# Altium PCB Game_Consol.PcbDoc
Units mil, origin at the board's own origin, x right, y up, seen from the top; angles counter-clockwise.
Board outline 3090.55 x 1732.28 mil, 2 copper layers (Top Layer, Bottom Layer); 54 components, 42 nets, 216 pads, 43 vias.
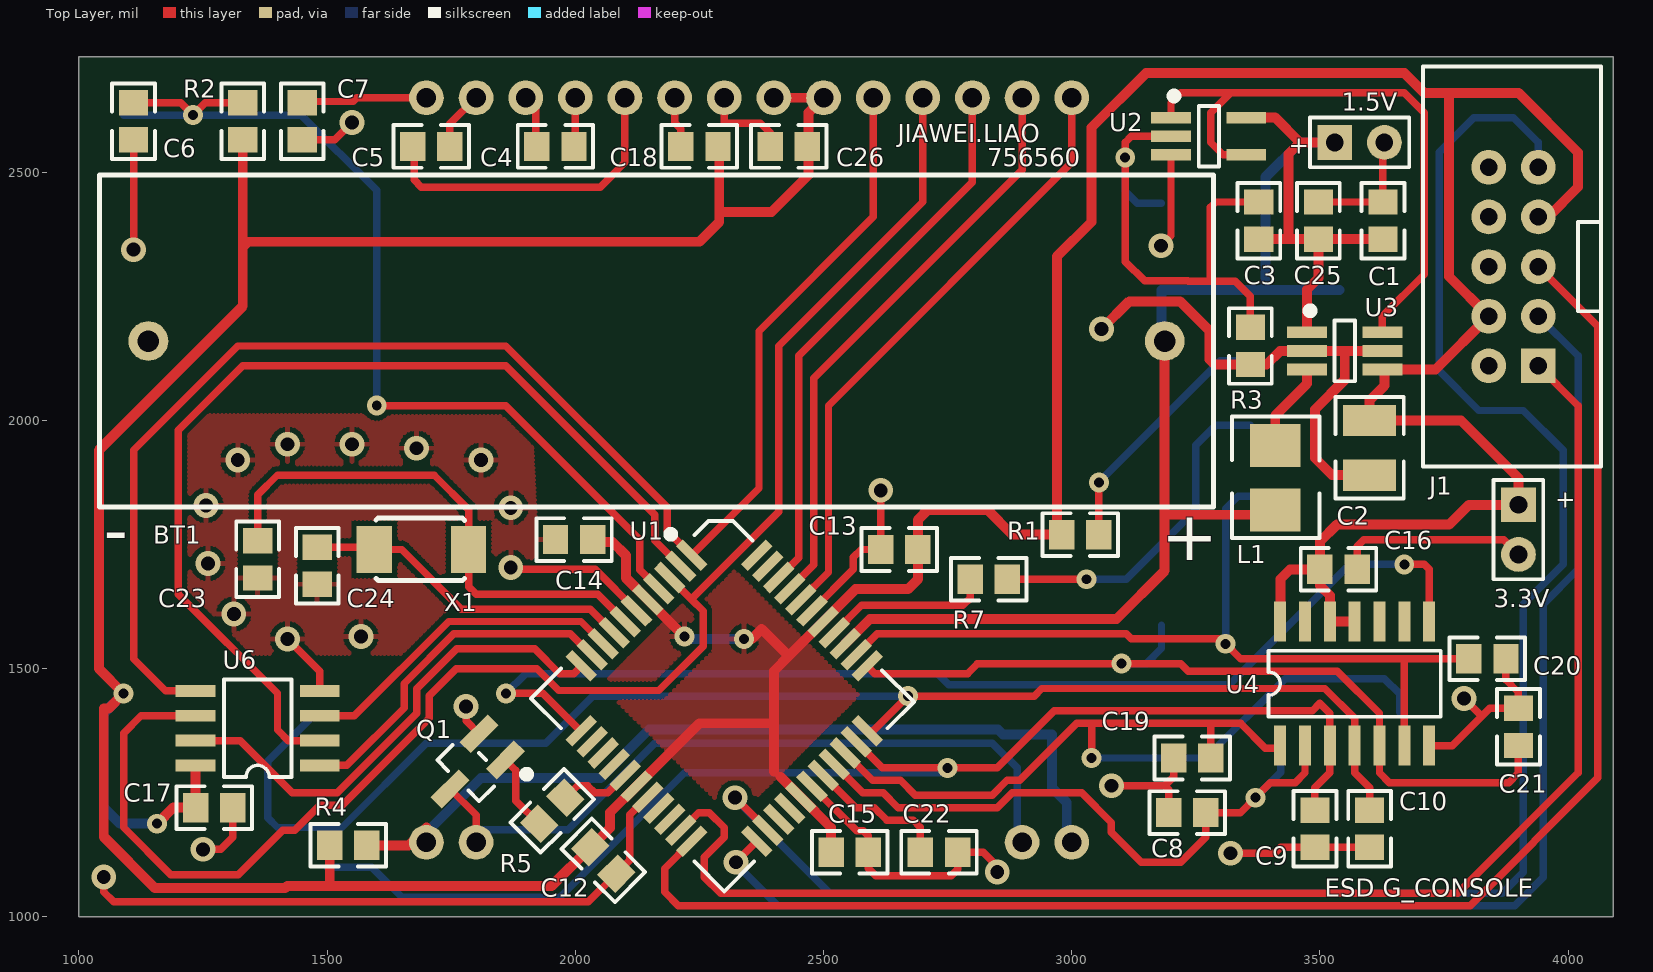
[diagram p0: Top Layer view]
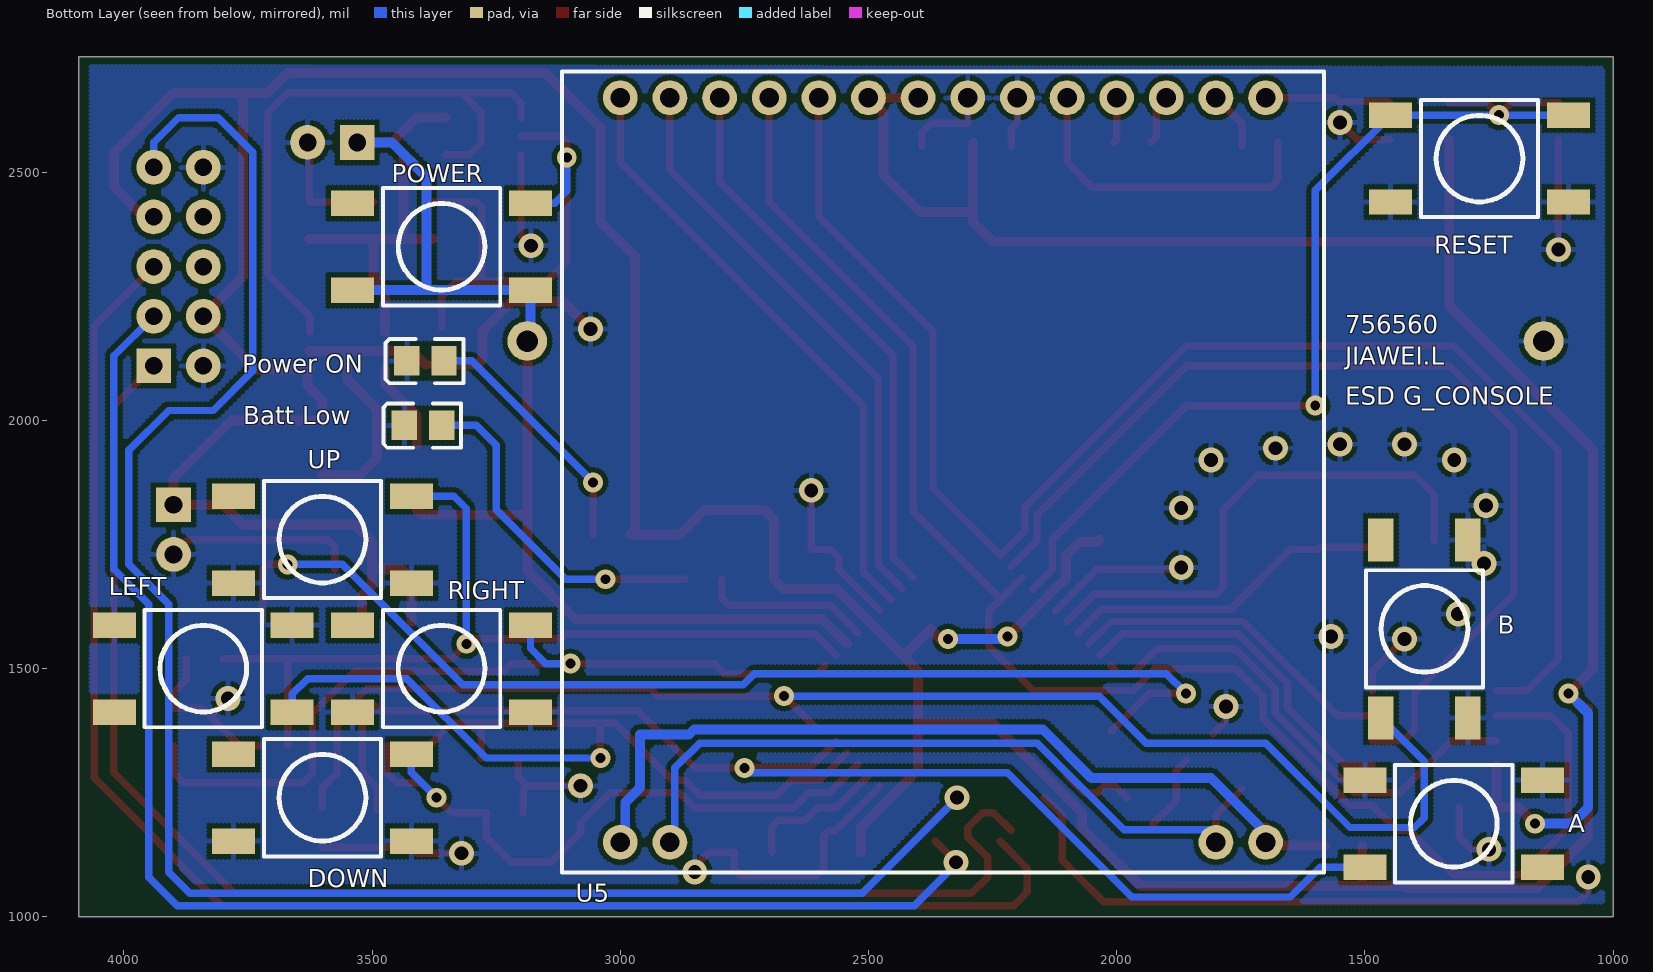
[diagram p1: Bottom Layer view, seen from below]
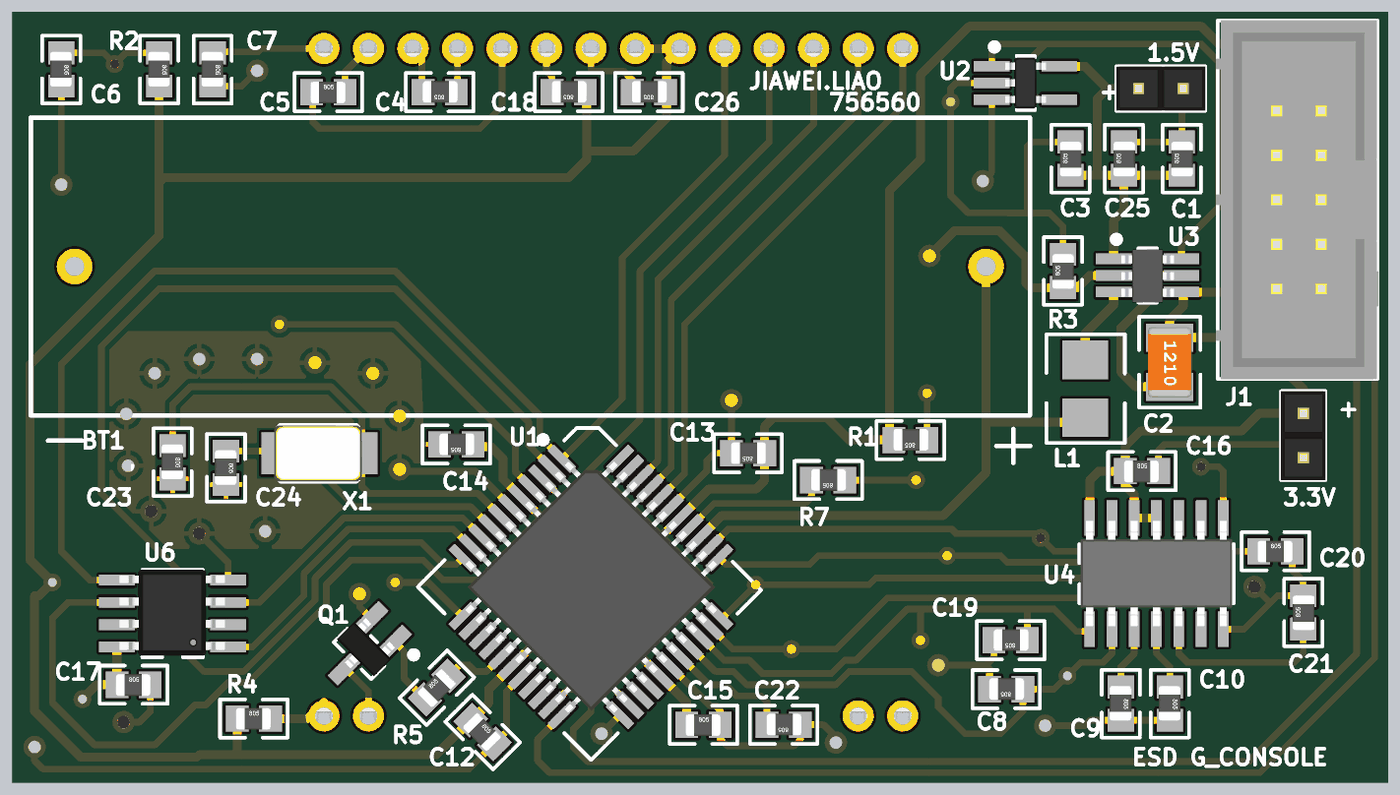
[diagram p2: 3D render of the assembled board from above, using the file's embedded part models]
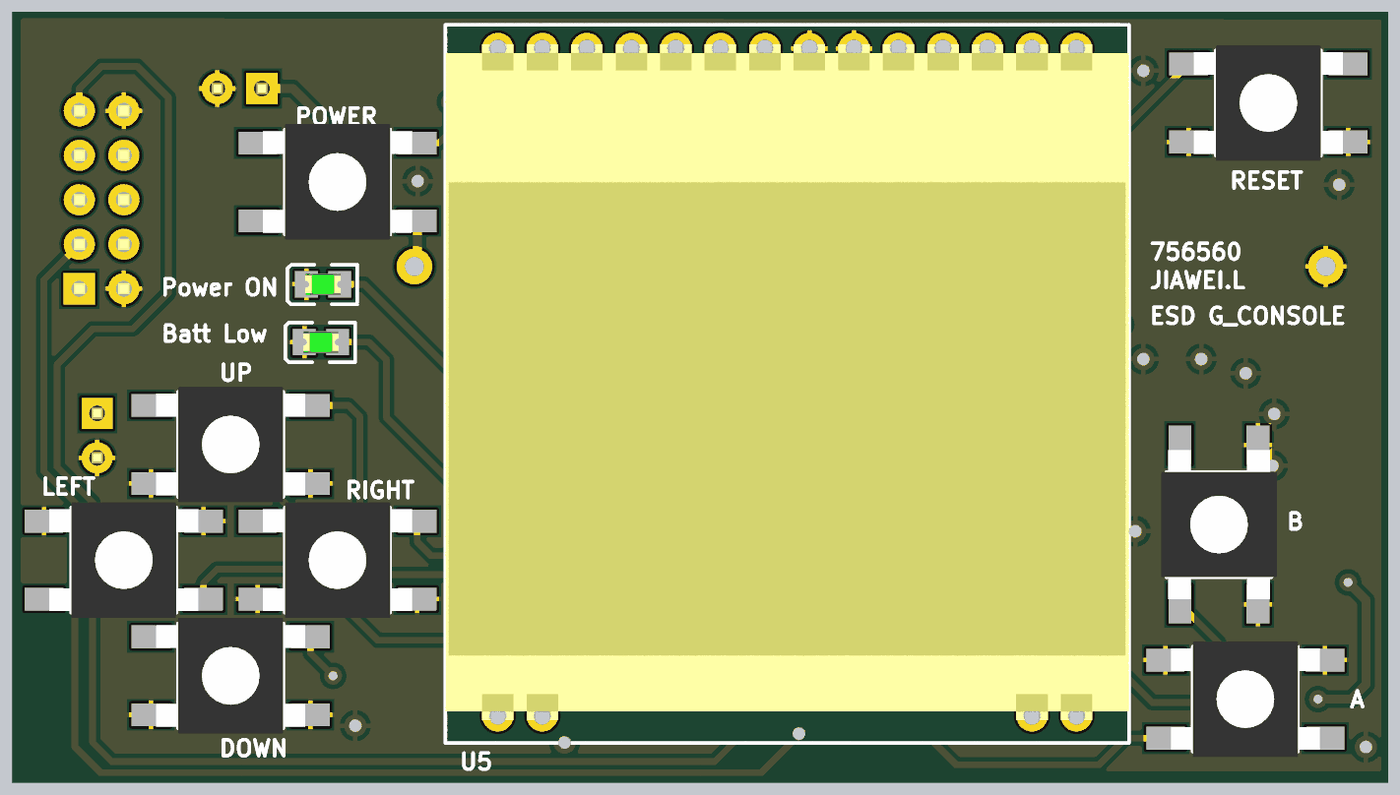
[diagram p3: 3D render of the assembled board from below, using the file's embedded part models]

## Layer stack, top to bottom
Top Solder: solder mask 0.4, Solder Resist, Dk 3.5
Top Layer: signal copper 1.4
Dielectric1: dielectric 12.6, FR-4, Dk 4.8
Bottom Layer: signal copper 1.4
Bottom Solder: solder mask 0.4, Solder Resist, Dk 3.5

## Board outline
1000,1000 1000,2732.28 4090.55,2732.28 4090.55,1000

## Design rules (kind name [scope] priority, off if disabled: settings)
Clearance [All] p1: gap=10 ignorepadtopadclearanceinfootprint=FALSE except(0: Arc-Hole Track-Hole SMDPad-Hole THPad-Hole Via-Hole Fill-Hole Poly-Hole Region-Hole Text-Hole)
ComponentClearance [All] p1 off: gap=10 collisioncheckmode=3 verticalgap=10 showdistances=FALSE
DiffPairsRouting [All] p1: maxlimit=20 minlimit=10 mostfreqgap=10 toplayer_minwidth=15 toplayer_maxwidth=15 toplayer_prefwidth=15 bottomlayer_minwidth=15 bottomlayer_maxwidth=15 bottomlayer_prefwidth=15 maxuncoupledlength=500
FabricationTestPointUsage TestPointUsage [All] p1: valid=0 allowmultiple=FALSE
FabricationTestpoint Testpoint [All] p1: side=3 testpointundercomponent=TRUE minsize=40 maxsize=100 preferedsize=60 minholesize=0 maxholesize=40 preferedholesize=32 testpointgrid=1 allowsidetop=TRUE allowsidebottom=TRUE usegrid=TRUE gridtolerance=0.01
Height [All] p1: minheight=0 maxheight=7874.02 prefheight=500
HoleSize [All] p1: absolutevalues=TRUE maxlimit=199 minlimit=20 maxpercent=80.000 minpercent=20.000
MinimumAnnularRing [All] p1: minimumring=6
PolygonConnect [All] p1: connectstyle=Relief reliefconductorwidth=10 reliefentries=4 polygonreliefangle="90 Angle" airgapwidth=10
RoutingVias [All] p1: holewidth=20 width=40 viastyle="Through Hole" minholewidth=15 minwidth=25 maxholewidth=80 maxwidth=100
SilkToSolderMaskClearance SilkscreenOverComponentPads [IsPad] p1: minsilkscreentomaskgap=10 clearancetoexposedcopper=TRUE
SolderMaskExpansion [All] p1: expansion=6
Width "VCC Width" [(InNet('1.5V') OR InNet('3.3V'))] p1: maxlimit=20 minlimit=20 preferedwidth=20 minimp=50.000000 maximp=50.000000 favimp=50.000000 // 20mil
Width [All] p2: maxlimit=1000 minlimit=10 preferedwidth=15 minimp=50.000000 maximp=50.000000 favimp=50.000000
23 further rules are at their usual default settings.

## Classes and differential pairs
component class Game_Consol_Top: A B "Batt Low" C4 C5 C6 C7 C8 C9 C10 C19 C20 C21 C22 C23 C24 DOWN J1 LEFT Q1 R2 R4 R5 R7 RESET RIGHT U1 U4 U5 U6 UP X1
component class Game_Consol_Power: 1.5V 3.3V BT1 C1 C2 C3 C12 C13 C14 C15 C16 C17 C18 C25 C26 L1 POWER "Power ON" R1 R3 U2 U3 v3

## Components (designator, comment, footprint, x,y, rotation, side; value= is the part's Value field where it differs from the comment)
1.5V "Func" HDR1X2 3530,2560 r0 top
3.3V "Func" HDR1X2 3900,1830 r270 top
A "SW-PB" SPNO_SMD 1320.87,1187.6 r0 bottom
B "SW-PB" SPNO_SMD 1380,1580 r90 bottom
"Batt Low" "Func" 0805D 3397.4,1990 r180 bottom
BT1 "1.5v" BATT_HOLDER 2163.62,2160 r0 top
C1 "1uF" 0805 3627,2402.6 r90 top
C2 "22uF" 1210 3600,1944.88 r270 top
C3 "100nF" 0805 3377,2402.6 r90 top
C4 "1uF" 0805 1960,2552 r180 top
C5 "1uF" 0805 1710,2552 r0 top
C6 "100nF" 0805 1110,2602.6 r270 top
C7 "1uF" 0805 1450,2602.6 r270 top
C8 "100nF" 0805 3232.6,1210 r180 top
C9 "100nF" 0805 3490,1177.4 r270 top
C10 "100nF" 0805 3600,1177.4 r270 top
C12 "100nF" 0805 2056.45,1113.55 r315 top
C13 "100nF" 0805 2652.6,1740 r180 top
C14 "100nF" 0805 1997.4,1760 r180 top
C15 "100nF" 0805 2552.6,1130 r0 top
C16 "100nF" 0805 3537.4,1700 r0 top
C17 "100nF" 0805 1272.6,1220 r0 top
C18 "100nF" 0805 2250,2552 r180 top
C19 "100nF" 0805 3242.6,1320 r180 top
C20 "100nF" 0805 3837.4,1520 r0 top
C21 "100nF" 0805 3900,1382.6 r90 top
C22 "100nF" 0805 2732.6,1130 r180 top
C23 "=Value" 0805 1360,1720 r270 top
C24 "18pF" 0805 1480,1707.4 r270 top
C25 "100nF" 0805 3497,2402.6 r90 top
C26 "100nF" 0805 2430,2552 r180 top
DOWN "SW-PB" SPNO_SMD 3600,1240 r180 bottom
J1 "JTAG" BOXEDVERT10 3940,2110 r90 top
L1 "4.7uH" 1210L 3410,1885 r270 top
LEFT "SW-PB" SPNO_SMD 3840,1500 r0 bottom
POWER "SW-PB" SPNO_SMD 3360,2350 r180 bottom
"Power ON" "Func" 0805D 3392.6,2120 r180 bottom
Q1 "RTR025N03TL" SOT23 1790,1300 r225 top
R1 "270" 0805 3017.4,1770 r180 top
R2 "10k" 0805 1330,2602.6 r270 top
R3 "10k" 0805 3360,2150 r90 top
R4 "15" 0805 1542.6,1144 r0 top
R5 "15" 0805 1953.55,1213.55 r45 top
R7 "1k" 0805 2832.6,1680 r180 top
RESET "SW-PB" SPNO_SMD 1269.13,2527.6 r180 bottom
RIGHT "SW-PB" SPNO_SMD 3360,1500 r180 bottom
U1 "ATMEGA16" QFP-48 2300,1440 r315 top
U2 "74AUG1G80" SOT23-5 3275.93,2572.6 r0 top
U3 "SC120" SOT23-6 3550,2140 r0 top
U4 "74AHC30" SOIC-14 3570,1470 r90 top
U5 "EA DOGS102x-6" "EA DOGS102x" 2350,1900 r180 bottom
U6 "FM25L04B" SOIC-8 1360,1380 r180 top
UP "SW-PB" SPNO_SMD 3600,1760 r180 bottom
X1 "7.68Mhz" XTAL_FLAT_SMD 1690,1740 r0 top

## Footprints (in the part's own frame and the unit in brackets; to place one, negate y for a bottom-side part, rotate by r counter-clockwise, add the part's x,y. Pads: shape width x height; smd on the part's side, far side on the other; paste and mask are expansions set on the pad)
0805 [mm] "0805 Footprint"
  rect 1.3x1.5 smd: 1(-0.95,0) 2(0.95,0)
  silkscreen extent -1.93,-1.09 1.93,1.09, body extent -1.03,-0.64 0.97,0.61, height 0.8
0805D [mm] "0805 Diode"
  rect 1.3x1.5 smd: A(0.95,0) K(-0.95,0)
  silkscreen extent -2.03,-1.14 1.95,1.12, body extent -1.01,-0.62 1.01,0.63, height 1.1
1210 [mm]
  rect 1.6x2.7 smd: 1(-1.4,0) 2(1.4,0)
  silkscreen extent -2.6,-1.75 2.6,1.75, body extent -2,-1.24 2,1.24, height 1.72
1210L [mm] "Precision Wire Wound Inductor, 2-Leads, Body 3.2x3.2mm, IPC Low Density"
  rect 2.2x2.6 smd: 1(-1.651,0) 2(1.651,0)
  silkscreen extent -3.12,-2.21 3.1,2.26, body extent -1.75,-1.75 1.75,1.75, height 2.2
BATT_HOLDER [mil]
  round 80 hole 43.31: 1(1023.62,0) 2(-1023.62,0)
  silkscreen extent -1122,-335 1122,335
BOXEDVERT10 [mil] "IDC Header 2.54mm Boxed 10 pins"
  rect 70x70 hole 35.43: 1(0,0)
  round 70 hole 35.43: 2(0,100) 3(100,0) 4(100,100) 5(200,0) 6(200,100) 7(300,0) 8(300,100) 9(400,0) 10(400,100)
  silkscreen extent -203,-127 603,232, body extent -204,-129 604,237, height 359
"EA DOGS102x" [mil] "graphics display footprint"
  round 70 hole 39.37: 1(-650,-750) 2(-550,-750) 13(550,-750) 14(650,-750) 15(650,750) 16(550,750) 17(450,750) 18(350,750) 19(250,750) 20(150,750) 21(50,750) 22(-50,750) 23(-150,750) 24(-250,750) 25(-350,750) 26(-450,750) 27(-550,750) 28(-650,750)
  silkscreen extent -768,-811 768,803, body extent -768,-807 768,807, height 213
HDR1X2 [mil] "Connector; Header; 2 Position"
  rect 70x70 hole 35.43: 1(0,0)
  round 70 hole 35.43: 2(100,0)
  silkscreen extent -50,-50 150,50, body extent -50,-50 150,50, height 333
QFP-48 [mm]
  rect 1.8x0.5 smd: 1(-6.35,4) 2(-6.35,3.2) 3(-6.35,2.4) 4(-6.35,1.6) 5(-6.35,0.8) 6(-6.35,0) 7(-6.35,-0.8) 8(-6.35,-1.6) 9(-6.35,-2.4) 10(-6.35,-3.2) 11(-6.35,-4) 23(6.35,-4) 24(6.35,-3.2) 25(6.35,-2.4) 26(6.35,-1.6) 27(6.35,-0.8) 28(6.35,0) 29(6.35,0.8) 30(6.35,1.6) 31(6.35,2.4) 32(6.35,3.2) 33(6.35,4)
  rect 0.5x1.8 smd: 12(-4,-6.35) 13(-3.2,-6.35) 14(-2.4,-6.35) 15(-1.6,-6.35) 16(-0.8,-6.35) 17(0,-6.35) 18(0.8,-6.35) 19(1.6,-6.35) 20(2.4,-6.35) 21(3.2,-6.35) 22(4,-6.35) 34(4,6.35) 35(3.2,6.35) 36(2.4,6.35) 37(1.6,6.35) 38(0.8,6.35) 39(0,6.35) 40(-0.8,6.35) 41(-1.6,6.35) 42(-2.4,6.35) 43(-3.2,6.35) 44(-4,6.35)
  silkscreen extent -8,-6.99 6.99,6.73, body extent -5.97,-6 6.03,6, height 1.13
SOIC-8 [mil] "SOIC-8 Footprint"
  rect 80x24 smd: 1(-125,75) 2(-125,25) 3(-125,-25) 4(-125,-75) 5(125,-75) 6(125,-25) 7(125,25) 8(125,75)
  silkscreen extent -68,-98 68,98, body extent -117,-98 119,94, height 67
SOIC-14 [mil] "SOIC-14 Footprint"
  rect 80x24 smd: 1(-125,150) 2(-125,100) 3(-125,50) 4(-125,0) 5(-125,-50) 6(-125,-100) 7(-125,-150)
  rect 80x24.02 smd: 8(125,-150) 9(125,-100) 10(125,-50) 11(125,0) 12(125,50) 13(125,100) 14(125,150)
  silkscreen extent -67,-173 66,173, body extent -118,-170 118,170, height 61
SOT23 [mil] "SOT23, 3-Leads, Body 3.0x2.5mm (max), Pitch 0.95mm, IPC Low Density"
  rect 80.24x31.5 smd: 1(-60,37.4)
  rect 80x31.5 smd: 2(-60,-37.4) 3(60,0)
  silkscreen extent -75,-59 37,93, body extent -52,-59 52,59, height 43
SOT23-5 [mm]
  rect 2.032x0.6 smd: 1(-1.929,0.95) 2(-1.929,0) 3(-1.929,-0.95) 4(1.929,-0.95) 5(1.929,0.95)
  silkscreen extent -1.9,-1.55 0.53,2.18, body extent -1.17,-1.46 1.17,1.46, height 1.02
SOT23-6 [mm]
  rect 2.032x0.6 smd: 1(-1.929,0.95) 2(-1.929,0) 3(-1.929,-0.95) 4(1.929,-0.95) 5(1.929,0) 6(1.929,0.95)
  silkscreen extent -1.9,-1.55 0.53,2.18, body extent -1.5,-1.56 1.5,1.49, height 1.42
SPNO_SMD [mm] "SP NO SMD Tactile switch"
  rect 2.2x1.3 smd: 1(-4.55,-2.225) 2(4.55,-2.225) 3(-4.55,2.225) 4(4.55,2.225)
  silkscreen extent -3,-3 3,3, body extent -4.25,-3.3 4.25,3.3, height 4.32
XTAL_FLAT_SMD [mm]
  rect 1.8x2.4 smd: 1(-2.412,0) 2(2.412,0)
  silkscreen extent -2.33,-1.59 2.21,1.6, body extent -2.58,-1.6 2.42,1.6, height 1.02

## Part data
1.5V 3.3V: library part HDR2, "2 Pin Header", LatestRevisionDate=17-Jul-2002, LatestRevisionNote="Re-released for DXP Platform.", Publisher="Altium Limited"
A B DOWN LEFT POWER RESET RIGHT UP: "Push Button Switch", Contact Rating @ Voltage="0.05A @ 12VDC", Manufacturer="TE Connectivity", Manufacturer Part Number=FSM4JSMA, Operating Force=160gf, Supplier Part Number 1=450-1129-ND, Actuator Orientation="Top Actuated", Actuator Type=Standard, Category=Switches, Circuit=SPST-NO, ComponentLink1Description=http://documents.tycoelectronics.com/commerce/DocumentDelivery/DDEController?Action=srchrtrv&DocNm=2-1437565-7&DocType=CD&DocLang=EN, ComponentLink1URL=http://documents.tycoelectronics.com/commerce/DocumentDelivery/DDEController?Action=srchrtrv&DocNm=2-1437565-7&DocType=CD&DocLang=EN, Illumination=Non-Illuminated, LatestRevisionDate=17-Jul-2002, LatestRevisionNote="Re-released for DXP Platform.", Mounting Type="Surface Mount", Outline="6.00mm x 6.00mm", PackageDescription="Switch; 2 Leads", PackageReference=SPST-2, Packaging=Bulk, Pricing 1="1=0.28, 10=0.265, 25=0.2256, 50=0.1974, 100=0.1834, 250=0.1622, 500=0.15516, 1000=0.12694, 5000=0.10579 (AUD)", Published=24-Mar-1999, Publisher="Altium Limited", RoHS="RoHS Compliant", Stock 1=30338, Supplier 1=Digi-Key, Switch Function=Off-Mom, Termination Style="Gull Wing"
"Batt Low": library part "LED RED", "Light Emitting Diode", Manufacturer="Generic Components", Class I=Discrete, Class II="Diode - Switching", Published=8-Jun-2000, Publisher="Altium Limited", Revision="July-2002: Re-released for DXP Platform."
BT1: library part BAT, "Battery Holder AA 1.5v", LatestRevisionDate=17-Jul-2002, LatestRevisionNote="Re-released for DXP Platform.", PackageDescription="Battery; 2 Leads", PackageReference=BAT-2, Published=24-Mar-1999, Publisher="Altium Limited"
C1 C3 C4 C5 C6 C7 C8 C9 C10 C12 C13 C14 C15 C16 C17 C18 C19 C20 C21 C22 C23 C24 C25 C26: library part "C 0805", "Capacitor 100nF", Class I=Passive, Revision="July-2002: Re-released for DXP Platform."
  C23: =18pF
C2: library part "C 1210", "Capacitor 22uF", Capacitance=22µF, Manufacturer="Generic Components", Manufacturer Part Number=LMK316F226ZL-T, Operating Temperature="-30°C ~ 85?", Package / Case="1206 (3216 Metric)", Ratings=-, Supplier Part Number 1=587-1356-1-ND, Temperature Coefficient="Y5V (F)", Tolerance="-20%, +80%", Voltage - Rated=10V, Applications="General Purpose", Category=Capacitors, Class I=Passive, Class II=Capacitor, ComponentLink1Description=http://www.yuden.co.jp/or/product/category/capacitor/LMK316F226ZL-T.pdf, ComponentLink1URL=http://www.yuden.co.jp/or/product/category/capacitor/LMK316F226ZL-T.pdf, Features=-, Height - Seated (Max)=-, Lead Spacing=-, Lead Style=-, Mounting Type="Surface Mount, MLCC", Packaging="Cut Tape (CT)", Pricing 1="1=0.3, 10=0.254, 50=0.143, 100=0.1271, 250=0.09532, 500=0.08418, 1000=0.07465 (AUD)", Published=8-Jun-2000, Publisher="Altium Limited", Revision="July-2002: Re-released for DXP Platform.", RoHS="RoHS Compliant", Size / Dimension="0.126\" L x 0.063\" W (3.20mm x 1.60mm)", Stock 1=33004, Supplier 1=Digi-Key, Thickness (Max)="0.071\" (1.80mm)"
J1: library part JTAG_CON, "JTAG ATMEL connector"
L1: library part "I 1210", "Inductor 4.7uH", Current=450mA, Current - Saturation=-, DC Resistance (DCR)="260 mOhm Max", Frequency - Self Resonant=43MHz, Frequency - Test=1MHz, Inductance=4.7µH, Manufacturer="Murata Electronics North America", Manufacturer Part Number=LQH32CN4R7M23L, Operating Temperature="-40°C ~ 85?", Package / Case="1210 (3225 Metric)", Supplier Part Number 1=490-2495-1-ND, Tolerance=?0%, Applications="Power Supplies", Category="Inductors, Coils, Chokes", Class II=Inductor, Code_IEC=1005, Code_JEITA=0402, ComponentLink1Description=http://search.murata.co.jp/Ceramy/image/img/PDF/ENG/L0075S0093LQH32C_23~33.pdf, ComponentLink1URL=http://search.murata.co.jp/Ceramy/image/img/PDF/ENG/L0075S0093LQH32C_23~33.pdf, Current - Temperature Rise=-, LatestRevisionDate=17-Jul-2002, LatestRevisionNote="Re-released for DXP Platform.", Material - Core=Ferrite, Mounting Type="Surface Mount", PackageReference=0402-A, Packaging="Cut Tape (CT)", Pricing 1="1=0.34, 10=0.313, 25=0.2784, 50=0.2436, 100=0.2261, 250=0.20868, 500=0.19824, 750=0.18084, 1000=0.15998 (AUD)", Published=8-Jun-2000, Publisher="Altium Limited", Q @ Freq=-, RoHS="RoHS Compliant", Shielding=Unshielded, Stock 1=31057, Supplier 1=Digi-Key, Type="Ferrite Core"
"Power ON": library part "LED GREEN", "Light Emitting Diode", Manufacturer="Generic Components", Class I=Discrete, Class II="Diode - Switching", Published=8-Jun-2000, Publisher="Altium Limited", Revision="July-2002: Re-released for DXP Platform."
Q1: library part MOSFET-N, "N-Channel MOSFET", PackageDocument=1995/1996, LatestRevisionDate=17-Jul-2002, LatestRevisionNote="Re-released for DXP Platform.", PackageReference=E3, Published=8-Jun-2000, Publisher="Altium Limited"
R1 R2 R3 R4 R5 R7: library part R, "Resistor"
U1: "ATMEGA16 Microcontroller"
U2: "Inverted single D flip flop"
U3: "Regulator Low Voltage"
U4: "1 x 8 Input NAND gate"
U5: "LCD 102x64-pixel with backlight"
U6: "FRAM 4Kb Memory"
X1: library part XTAL, "Crystal Oscillator", Digikey=535-9103-1-ND, Revision="July-2002: Re-released for DXP Platform."

## Via types
v1: diameter 50, hole 28, Top Layer to Bottom Layer, tented both sides, 26 vias
v2: diameter 40, hole 20, Top Layer to Bottom Layer, tented both sides, 17 vias

## Nets (pads, with @x,y where several pads share a name; then routed paths per layer and width w, separated by ;. In a path a pad name is that pad's centre, name@x,y a point inside that pad or via, vN(x,y) a via of type N, cw(c..) or ccw(c..) an arc to the next point about the centre after c; other vN are vias at no path point)
1.5V: 1.5V.1 BT1.1 C1.1 C3.1 C25.1 L1.2 POWER.1 POWER.2 U1.36 U2.5 U3.1 | length 3104.7
  Top Layer w20: U1.36 2593.63,1600 3090,1600 3187.24,1697.24 3187.24,1810 ; BT1.1 3187.24,1810 ; U2.5 3410,2610 3460,2560 ; C3.1 3437,2365.2 ; L1.2 3400,1810 3187.24,1810 ; U3.1 3474.07,2264.07 3497,2287 C25.1 ; 1.5V.1 3460,2560 ; C1.1 C25.1 ; 3437,2365.2 3437,2537 3460,2560 ; 3437,2365.2 C25.1
  Bottom Layer w20: BT1.1 3180.87,2166.38 POWER.2 3390,2262.4 ; 1.5V.1 3460,2560 3390,2490 3390,2262.4 ; POWER.1 3390,2262.4
3.3V: 3.3V.1 C2.1 C12.1 C13.1 C14.1 C15.1 C16.1 C17.1 C18.1 C26.1 J1.4 J1.7 R1.2 R2.2 R4.1 U1.5 U1.17 U1.27 U1.38 U3.4 U4.11 U4.12 U4.14 U5.22 U5.23 U6.8 | length 11308
  Top Layer w20: v2(1157.6,1187.6) 1190,1220 C17.1 1235,1220.2 U6.8 ; R2.2 1330,2350 ; R4.1 1505.2,1067.32 1510,1062.52 ; C14.1 2040,1754.8 2075.2,1754.8 2102.5,1727.5 2102.5,1682.04 U1.5 2200,1584.54 v2(2220,1564.54) ; C18.1@2290,2560 2290,2420 ; v2(2340,1560) 2355.46,1560 2375.46,1580 2430,1525.46 ; 2400,1293.12 2400,1394.29 ; U5.22 2480,2650 U5.23@2490,2640 ; 2413.23,1282.23 U1.27 2515.2,1180.26 C15.1 ; U5.23@2490,2660 U5.23@2490,2640 ; U5.23 U5.23@2490,2640 ; U4.14 3420.87,1595.87 3420.87,1680.87 3440,1700 C16.1 ; U4.11 U4.12 3520,1647 3500,1667 C16.1 ; U3.4 3732.6,2102.6 J1.4 3760,2290 3760,2660 ; 3630,2090 3630,2070 3600,2040 C2.1 3784,2000 3900,1884 3.3V.1 3800,1830 3760,1790 3534,1790 3500,1756 C16.1 ; J1.7 3960,2410 4020,2470 4020,2540 3900,2660 3760,2660 ; 1330,2350 1330,2230 1040,1940 1040,1500 v2(1090,1450) 1060,1420 1050,1420 1050,1161.22 1153.55,1057.67 1415.16,1057.67 1420,1062.52 1510,1062.52 ; 1330,2350 1340,2360 2250,2360 2290,2400 2290,2420 ; 1510,1062.52 1952.52,1062.52 C12.1 2030.81,1140 2070,1179.19 2070,1210 U1.17 2250,1390 2395.71,1390 2400,1394.29 ; 2290,2420 2395.35,2420 2470,2494.65 2470,2620 U5.23@2490,2640 ; 2400,1394.29 2400,1495.46 2430,1525.46 ; 2430,1525.46 U1.38 2564.54,1660 2670,1660 2690,1680 C13.1 2690,1800 2710,1820 2830,1820 2880,1770 R1.2 2970,1780 2970,2330 3040,2400 3040,2590 3150,2700 3670,2700 3710,2660 3760,2660
  Bottom Layer w20: v2(1090,1450) 1050,1410 1050,1220 1082.4,1187.6 v2(1157.6,1187.6) ; v2(2220,1564.54) 2220,1560 v2(2340,1560)
A_BUTTON: A.4 C9.1 U1.32 U4.3 | length 2628.1
  Top Layer w15: U1.32 2618.17,1300 v2(2750,1300) 2850,1300 2965,1415 3485,1415 3500,1430 3520,1410 U4.3 3520,1290 3490,1260 C9.1
  Bottom Layer w15: A.4 1590,1100 1650,1040 1970,1040 2220,1290 2740,1290 v2(2750,1300)
B_BUTTON: B.3 C10.1 U1.33 U4.4 | length 2879.6
  Top Layer w15: U1.33 2599.81,1374.58 v2(2670,1444.77) 2924.77,1444.77 2940,1460 3510,1460 3570,1400 U4.4 3570,1290 3600,1260 C10.1@3600,1220
  Bottom Layer w15: B.3 1380,1313.27 1380,1200 1400,1180 1530,1180 1700,1350 1940,1350 2034.77,1444.77 v2(2670,1444.77)
DATA: U1.42 U5.26 | length 1128
  Top Layer w15: U1.42 2450,1723.62 2450,2130 2800,2480 U5.26
DOWN: C8.1 DOWN.4 U1.30 U4.2 | length 1344.7
  Top Layer w15: U1.30 2579.08,1250 2620,1250 2650,1220 2850,1220 2880,1250 3020,1250 3080,1190 3080,1170 3140,1110 3220,1110 3270,1160 C8.1 3340,1210 v2(3370,1240) 3400,1270 3450,1270 3470,1290 U4.2
  Bottom Layer w15: v2@3370,1250 v2(3370,1240) 3420.87,1290.87 DOWN.4
EN: U2.1 U2.4 U3.6 | length 1241
  Top Layer w15: U2.1 3200,2640 3220,2660 3320,2660 ; U2.4 3304.8,2535.2 3280,2560 3280,2620 3320,2660 ; U3.6 3625.93,2209.93 3710,2294 3710,2620 3670,2660 3320,2660
GND: 1.5V.2 3.3V.2 "Batt Low.K" "Power ON.K" A.1 A.2 B.1 B.2 BT1.2 C1.2 C2.2 C6.2 C7.2 C8.2 C9.2 C10.2 C12.2 C13.2 C14.2 C15.2 C16.2 C17.2 C18.2 C19.2 C20.2 C21.2 C22.1 C23.2 C24.2 C25.2 C26.2 DOWN.1 DOWN.2 J1.2 J1.10 LEFT.1 LEFT.2 Q1.2 R3.1 RESET.1 RESET.2 RIGHT.1 RIGHT.2 U1.6 U1.18 U1.28 U1.39 U2.3 U3.2 U3.5 U4.7 U5.20 U5.21 U6.4 UP.1 UP.2 | length 6142.9
  Top Layer w15: v1(1050,1080) 1050,1050 1069.83,1030.17 2025.96,1030.17 C12.2 2110,1114.21 2110,1205.46 U1.18 ; v1(1110,2344) C6.2 ; v1(1250,1136) 1286,1136 1310,1160 C17.2 ; v1(1420,1560) 1485,1495 U6.4 ; C7.2 1515.2,2565.2 v1(1550,2600) ; v1(1780,1424) 1780,1394.85 Q1.2 ; v1(1870,1704) 1874,1700 2040,1700 U1.6 ; U5.20 2200,2600 2212.6,2587.4 C18.2 ; U5.21 2300,2599.03 2372.97,2599.03 2392.6,2579.4 C26.2 ; U1.28 2567,1173 2580,1173 2590,1163 C15.2 2590,1098 2605.03,1082.97 2756.97,1082.97 2770,1096 C22.1 2822,1130 2850,1102 v1(2850,1090) ; U1.39 2560,1700 2560,1724 2576,1740 C13.2 v1(2615.2,1859.2) ; v1(3080,1264) 3187,1264 ; v1(3180,2352) 3200,2372 U2.3 ; C8.2 3195.2,1255.8 3187,1264 ; C19.2 3205.2,1282.2 3187,1264 ; v1(3320,1128) 3408.87,1128 3420.87,1140 C9.2 C10.2 ; R3.1 3392.6,2112.6 ; C25.2 C1.2 3627,2557 1.5V.2 ; C16.2 3574.8,1746.8 3588,1760 3870,1760 3.3V.2 ; U4.7 3767,1345 3842,1420 C21.2 3900,1452 3874.8,1477.2 C20.2 ; v1(3790,1440) 3820,1410
  Top Layer w20: v1(3060,2184) 3116,2240 3218,2240 3277.24,2180.76 3277.24,2122.76 3287.4,2112.6 R3.1 ; 3392.6,2112.6 3420,2140 U3.2 3550,2140 ; C2.2 3524.24,1889.76 3490,1924 3490,2022 3550,2082 3550,2140 ; U3.5 3550,2140
  other v1: 1568,1565.03 1312,1610 1260,1712 1870,1824 1256,1828.82 1320,1920 1810,1920 1680,1944 1420,1952 1550,1952
HOLD: U1.11 U6.7 | length 996.5
  Top Layer w15: U6.7 1325,1355 1430,1250 1520,1250 1680.32,1410.32 1680.32,1459.61 1760.71,1540 1918.18,1540 1968.18,1490 1996.45,1490 U1.11
INTERRUPT: U1.12 U4.8 | length 2278.6
  Top Layer w15: v2(1860,1450) 1934.77,1450 2010.19,1374.58 U1.12 ; v2(3670,1710) 3710,1710 3720,1700 U4.8
  Bottom Layer w15: v2(1860,1450) 1900,1490 2730,1490 2752.5,1467.5 3317.5,1467.5 3560,1710 v2(3670,1710)
LEFT: C19.1 LEFT.3 U1.31 U4.1 | length 1871.1
  Top Layer w15: U1.31 2598.63,1275 2655,1275 2685,1245 2839.64,1245 2869.64,1275 2895,1275 3010,1390 3040,1390 ; v2(3040,1320) 3040,1390 ; C19.1 3280,1390 ; U4.1 3415,1340 3390.08,1340 3340.08,1390 3280,1390 ; 3040,1390 3280,1390
  Bottom Layer w15: v2(3040,1320) 3270,1320 3430,1480 3630,1480 3660.87,1449.13 LEFT.3
MISO: U1.2 U6.2 | length 2044
  Top Layer w15: U6.2 1421.73,1355 1400,1376.73 1400,1450 1200,1650 1200,1980 1330,2110 1860,2110 2160,1810 2160,1758.17 U1.2
MOSI: U1.1 U5.24 U6.5 | length 3059.2
  Top Layer w15: U6.5 1175,1455 1110,1520 1110,1940 1320,2150 1860,2150 2185,1825 2185,1777.71 U1.1 2370,1863.55 2370,2180 2600,2410 U5.24
"NetBatt Low_A": "Batt Low.A" R7.1 | length 694.6
  Top Layer w15: R7.1 v2(3030,1680)
  Bottom Layer w15: v2(3030,1680) 3110,1680 3250,1820 3250,1950 3290,1990 3360,1990
NetC3_2: C3.2 POWER.4 R3.2 U2.2 | length 1083.3
  Top Layer w15: U2.2 3120.32,2572.6 3107.72,2560 v2(3107.72,2530) 3107.72,2320 3146.72,2281 3233.84,2281 3234.34,2280.5 3279.5,2280.5 ; R3.2 3360,2250 3329.5,2280.5 3279.5,2280.5 ; C3.2 3290,2440 3279.5,2429.5 3279.5,2280.5
  Bottom Layer w15: v2(3107.72,2530) 3107.72,2462.28 3132.4,2437.6 POWER.4
NetC4_1: C4.1 U5.18 | length 106.1
  Top Layer w15: U5.18@1990,2660 U5.18 2000,2564.8 C4.1@2004.8,2560
NetC4_2: C4.2 U5.17 | length 102.4
  Top Layer w15: U5.17 1920,2630 1920,2570 C4.2@1930,2560
NetC5_1: C5.1 U5.19 | length 656.8
  Top Layer w15: C5.1@1675.2,2560 1675.2,2484.8 1690,2470 2050,2470 2100,2520 U5.19
NetC7_1: C7.1 U5.15 | length 248.3
  Top Layer w15: C7.1 1452.5,2642.5 1552.5,2642.5 1560,2650 1680,2650 U5.15@1690,2660
NetC22_2: C22.2 U1.29 | length 290.3
  Top Layer w15: U1.29 2564.54,1220 2602,1220 2627,1195 2681,1195 2695.2,1180.8 C22.2
NetC23_1: C23.1 U1.7 X1.2 | length 1063.5
  Top Layer w15: C23.1 1360,1850 1400,1890 1715.35,1890 1784.98,1820.37 X1.2 1784.98,1665.02 1800,1650 2045.46,1650 U1.7
NetC24_1: C24.1 U1.8 X1.1 | length 670.2
  Top Layer w15: C24.1 1590.22,1744.8 X1.1 1650,1740 1770,1620 2030,1620 2077.77,1572.23 U1.8
NetL1_1: L1.1 U3.3 | length 179.1
  Top Layer w20: L1.1 3410,2010 3474.07,2074.07 U3.3
"NetPower ON_A": "Power ON.A" R1.1 | length 507
  Top Layer w15: R1.1 v2(3054.8,1875.2)
  Bottom Layer w15: v2(3054.8,1875.2) 3299.6,2120 3355.2,2120
NetQ1_1: Q1.1 R5.1 | length 157.1
  Top Layer w15: Q1.1 1880,1294.85 1880,1234.21 R5.1
NetQ1_3: Q1.3 U5.2 U5.13 | length 1468.7
  Top Layer w15: Q1.3 1800,1205.15 U5.13
  Bottom Layer w15: U5.13@1790,1160 1805,1175 1985,1175 2160,1350 2840,1350 2890,1300 U5.2@2890,1160
NetR4_2: R4.2 U5.1 U5.14 | length 1719.1
  Top Layer w20: R4.2 1664,1144 U5.14@1700,1180
  Bottom Layer w20: U5.14@1690,1160 1810,1280 2051.11,1280 2148.61,1377.5 2851.39,1377.5 2861.37,1367.52 2960,1367.52 2960,1260 2990,1230 U5.1@2990,1160
NetR7_2: R7.2 U1.37 | length 340.7
  Top Layer w15: U1.37 2576.59,1627.5 2780.5,1627.5 2795.2,1642.2 R7.2
PWM: R5.2 U1.16 | length 151.9
  Top Layer w15: R5.2 2004.59,1264.59 2024.59,1264.59 2039.17,1250 2065.46,1250 U1.16
RESET: C6.1 R2.1 RESET.3 RESET.4 U1.4 | length 2003
  Top Layer w15: C6.1 1205.2,2640 v2(1230,2615.2) 1254.8,2640 R2.1 ; v2(1600,2030) 1860,2030 2130,1760 2130,1699.08 U1.4
  Bottom Layer w15: RESET.4 v2(1230,2615.2) RESET.3 1600,2463.47 v2(1600,2030)
RIGHT: C21.1 RIGHT.4 U1.34 U4.5 | length 1700.1
  Top Layer w15: U1.34 2603.55,1490 2790.1,1490 2810.1,1510 v2(3100,1510) 3220,1510 3235,1495 3535,1495 3620,1410 U4.5 3620,1290 3640,1270 3880,1270 3900,1290 C21.1
  Bottom Layer w15: v2(3100,1510) 3150,1510 3180.87,1540.87 RIGHT.4
RST: U1.41 U5.27 | length 1182.4
  Top Layer w15: U1.41 2480,1709.08 2480,2084.65 2900,2504.65 U5.27
SCK: U1.3 U5.25 U6.6 | length 3179.5
  Top Layer w15: U6.6 1125,1405 1090,1370 1090,1180 1184.83,1085.17 1321.17,1085.17 1410.73,1174.73 1434.73,1174.73 1485,1225 1530.36,1225 1705.32,1399.97 1705.32,1445.32 1760,1500 1922.82,1500 1966.92,1455.91 2168.41,1455.91 2257.5,1545 2257.5,1616.13 2233.63,1640 ; U1.3 2233.63,1640 ; U5.25 2700,2440 2410,2150 2410,1816.37 2233.63,1640
SS_LCD: U1.40 U5.28 | length 1245.2
  Top Layer w15: U1.40 2510,1694.54 2510,2030 3000,2520 3000,2630 2990,2640 U5.28
SS_RAM: U1.10 U6.1 | length 705.3
  Top Layer w15: U6.1 1539.64,1305 1655.32,1420.68 1655.32,1469.97 1755.36,1570 1990,1570 2032.31,1527.69 U1.10
TCK: J1.1 U1.21 | length 2958.6
  Top Layer w15: U1.21 2248.17,1210 2270,1210 2300,1180 2300,1160 2260,1120 2260,1080 2292.5,1047.5 3777.5,1047.5 4020,1290 4020,2030 J1.1
TDI: J1.9 U1.24 | length 3721.4
  Top Layer w15: v1(2321.83,1240) U1.24
  Bottom Layer w15: v1(2321.83,1240) 2320,1240 2512.5,1047.5 3867.5,1047.5 3910,1090 3910,1630 3990,1710 3990,1940 3910,2020 3820,2020 3740,2100 3740,2540 3810,2610 3890,2610 3940,2560 J1.9
TDO: J1.3 U1.23 | length 2945
  Top Layer w15: v1(2323.55,1110) U1.23
  Bottom Layer w15: v1(2323.55,1110) 2320,1110 2407.5,1022.5 3892.5,1022.5 3950,1080 3950,1630 4020,1700 4020,2130 J1.3
TMS: J1.5 U1.22 | length 3202.2
  Top Layer w15: U1.22 2180,1097.29 2180,1050 2207.5,1022.5 3802.5,1022.5 4060,1280 4060,2190 J1.5
UP: C20.1 U1.35 U4.6 UP.4 | length 1841.2
  Top Layer w15: U1.35 2608.17,1570 3110.1,1570 3120.1,1560 3300,1560 v2(3310,1550) 3340,1520 3670,1520 ; U4.6 3670,1520 ; C20.1 3670,1520
  Bottom Layer w15: v2(3310,1550) 3310,1822.57 3335.02,1847.6 UP.4
VB1: C5.2 U5.16 | length 137.1
  Top Layer w15: C5.2 1747.4,2597.4 U5.16 ; U5.16@1790,2642.66 U5.16@1790,2660
WP: U1.9 U6.3 | length 668.8
  Top Layer w15: U6.3 1555,1405 1745,1595 2011.37,1595 U1.9
pads on no net: A.3 B.4 DOWN.3 J1.6 J1.8 LEFT.4 POWER.3 RIGHT.3 U1.13 U1.14 U1.15 U1.19 U1.20 U1.25 U1.26 U1.43 U1.44 U4.9 U4.10 U4.13 UP.3

## Polygon pours and split planes (outlines as drawn)
GND on Top Layer "Top Layer-GND" (hatched 90Degree grid 8 track 10, remove dead copper, pour order 2): 1189.79,2009.79 1910,2009.79 1930,1550 1910,1530 1200,1530
3.3V on Top Layer "Top Layer-3.3V" (hatched 90Degree grid 8 track 10, remove dead copper, pour order 0): 2054.27,1465.73 2302.5,1713.97 2569.15,1447.32 2320.92,1199.08
GND on Bottom Layer "Bottom Layer-GND" (hatched 90Degree grid 8 track 10, remove dead copper, pour order 6): 1020,2710 1020,1030 4060,1030 4066.5,1036.5 4066.5,2713

## Silkscreen, mask and mechanical layers (free items; w line width, h text height)
Top Overlay:
  text "JIAWEI.LIAO" at 2650,2560 h36
  text "+" at 3437,2537 h36
  text "756560" at 2830,2512 h36
  text "+" at 3973.75,1824 h36
  text "ESD G_CONSOLE" at 3510,1040 h36
Bottom Overlay:
  text "756560" at 1540,2176 h36
  text "JIAWEI.L" at 1540,2112 h36
  text "ESD G_CONSOLE" at 1540,2032 h36
Mechanical 1:
  the board outline again, w10

## Text inside footprints (layer, text, board x,y; h text height)
BT1: Top Overlay "+" at 3180,1718.18 h100; Top Overlay "-" at 1050,1730 h100